# EAGLE board tACS_precision_revised (EAGLE 7.3.0)
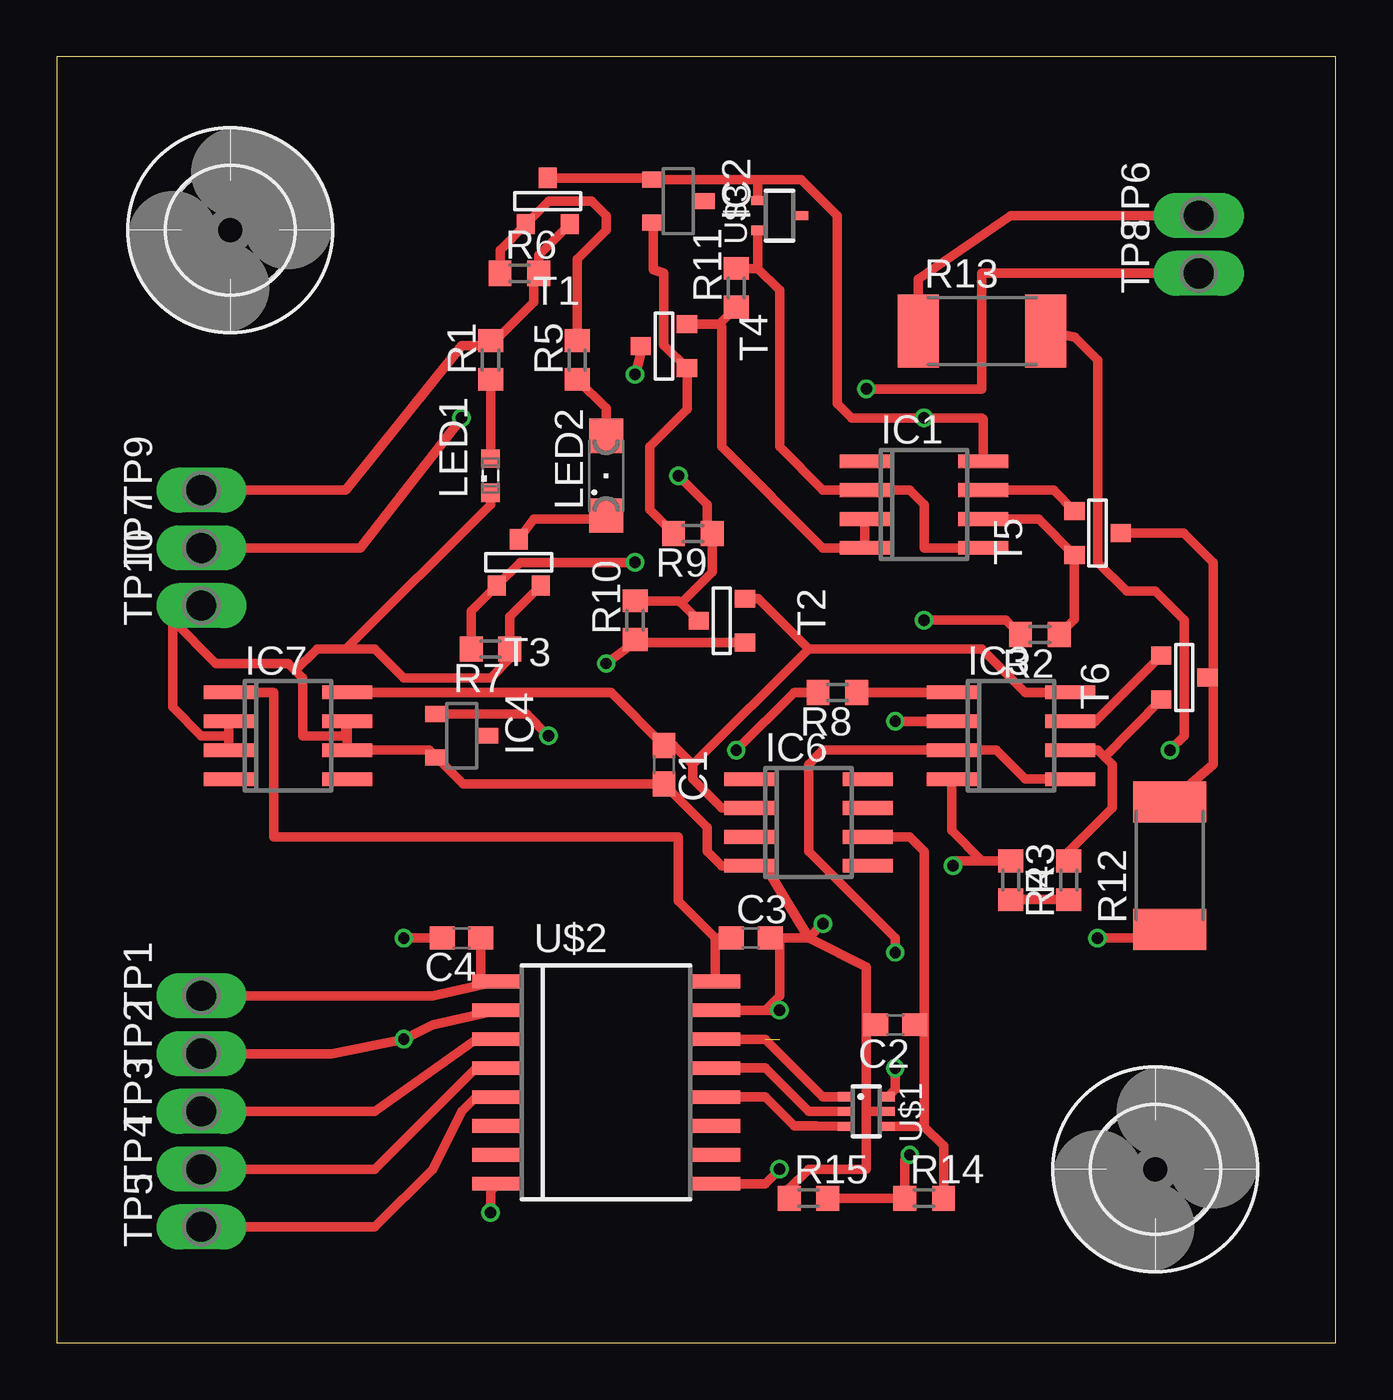
[diagram p0: board, top side]
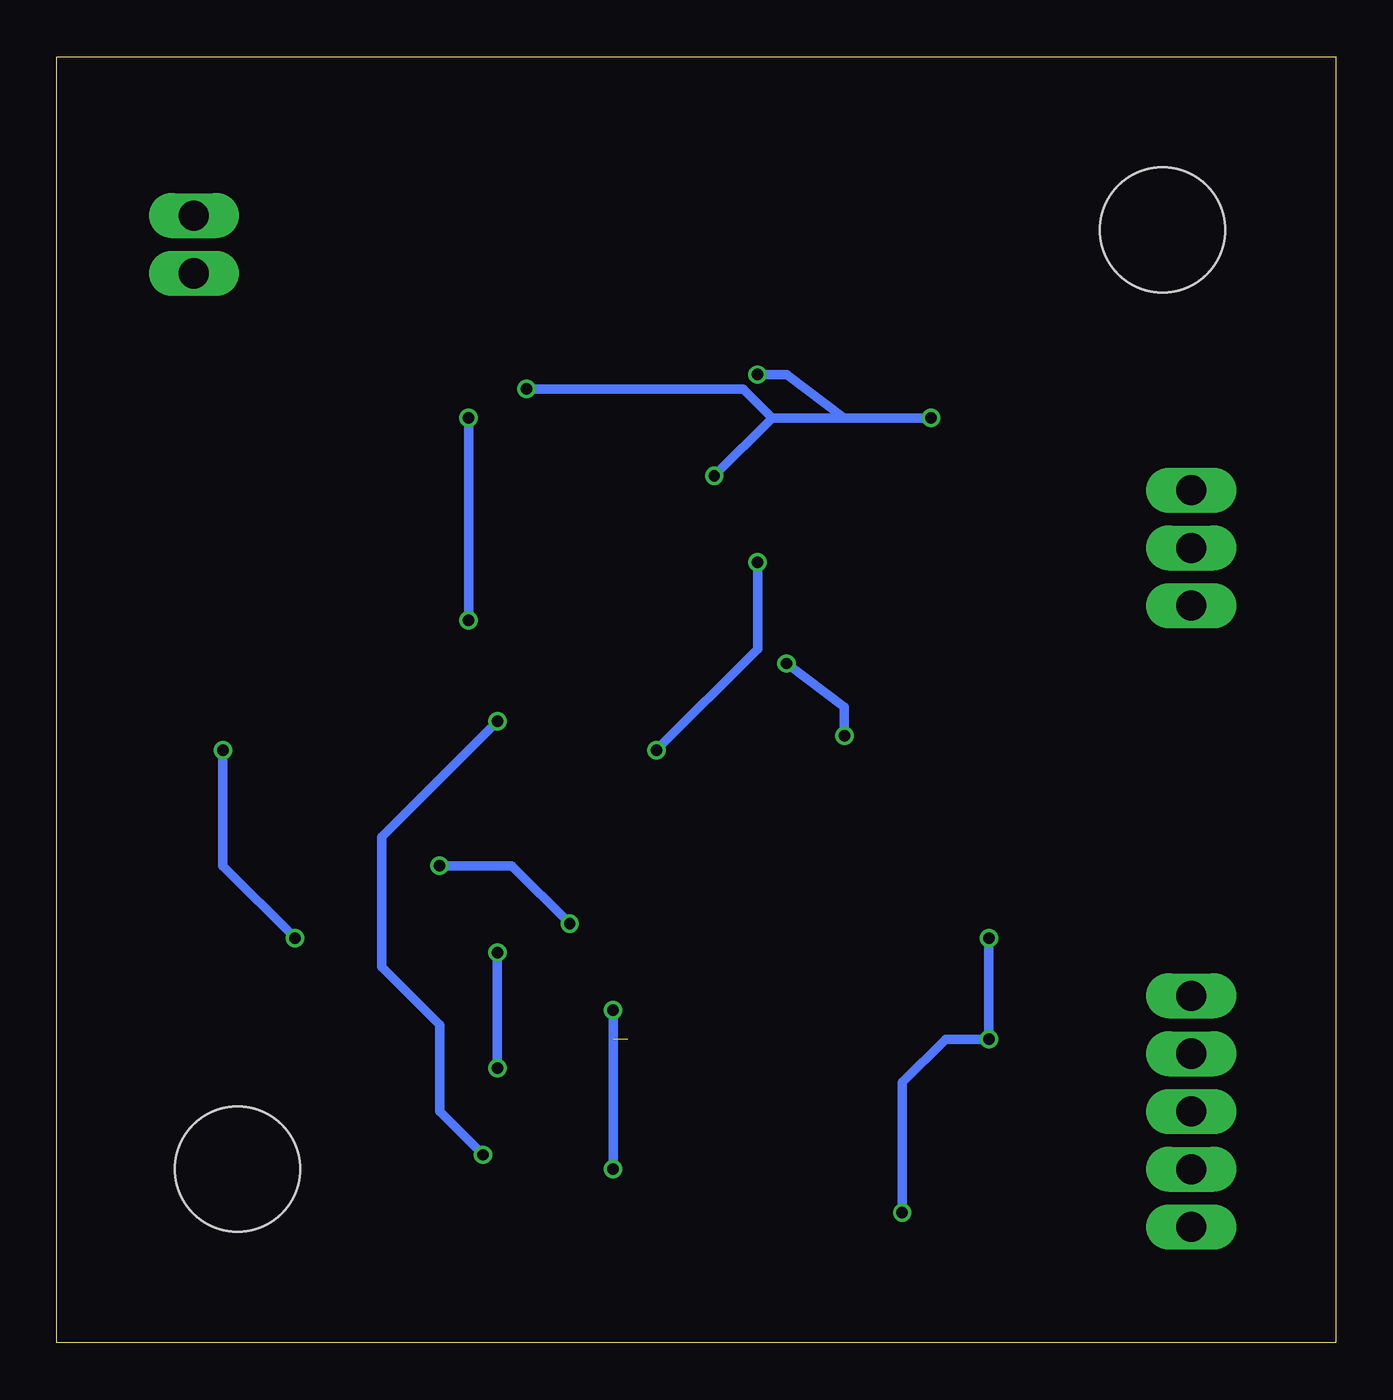
[diagram p1: board, bottom side, seen from below]

Size 56.19 x 56.51 mm. Coordinates in mm from the lower left corner, seen from the top.
Outline: 0,0 56.19,0 56.19,56.51 0,56.51 0,0
Copper layers (1*16): Top 0.035mm / dielectric 1.5mm / Bottom 0.035mm
Design rules "SeeedStudio_2layer_DRU_no_angle_20140221": minimum track width 6mil, minimum drill 12mil, track to track 6mil, track to pad 6mil, pad to pad 6mil, via to via 6mil, smd to smd 0mil, copper to edge 10mil, drill to drill 10mil, minimum pad ring 10mil, minimum via ring 6mil, stop-mask expansion 2mil, vias tented up to drill 100mil, thermal gap 10mil

## Footprints (pad centres in the part's own frame; a part is rotated, then mirrored left to right if it is on the bottom)
C1608 = smd 1.1 x 1: 1 -0.85,0; 2 0.85,0
5,5 = hole 5.5: 0,0
SO08 = smd 0.6 x 2.2: 1 -1.905,-2.6; 2 -0.635,-2.6; 3 0.635,-2.6; 4 1.905,-2.6; 5 1.905,2.6; 6 0.635,2.6; 7 -0.635,2.6; 8 -1.905,2.6
DBZ_R-PDSO-G3 = smd 0.7 x 1: 1 -0.95,-1.1; 2 0.95,-1.1; 3 0,1.1
SML0603 = smd 0.8 x 0.8: A 0.75,0; C -0.75,0
SML1206 = smd 1.5 x 1.5: A 1.75,0; C -1.75,0
R0603 = smd 1 x 1.1: 1 -0.85,0; 2 0.85,0
R2512 = smd 1.8 x 3.2: 1 -2.8,0; 2 2.8,0
SOT-23 = smd 0.787 x 0.889: 1 0.025,-1.016; 2 -0.94,1.016; 3 0.991,1.016
P1-13Y = drill 1.321 pad 1.905 long: TP 0,0
SC70-6 = smd 0.4 x 0.6: 1 -0.65,-0.95; 2 0,-0.95; 3 0.65,-0.95; 4 0.65,0.95; 5 0,0.95; 6 -0.65,0.95
SOIC16R = smd 0.6 x 2.2: 1 -4.445,-4.775; 2 -3.175,-4.775; 3 -1.905,-4.775; 4 -0.635,-4.775; 5 0.635,-4.775; 6 1.905,-4.775; 7 3.175,-4.775; 8 4.445,-4.775; 9 4.445,4.8; 10 3.175,4.8; 11 1.905,4.8; 12 0.635,4.8; 13 -0.635,4.8; 14 -1.905,4.8; 15 -3.175,4.8; 16 -4.445,4.8
SC70-3 = smd 0.4 x 0.6: 2 0,-0.95; ANODE -0.65,0.95; CATHODE 0.65,0.95

## Placement (x,y rotation side)
C1  1uF  [C1608]  26.67,25.4 270 top
C2  1uF  [C1608]  36.83,13.97 180 top
C3  1uF  [C1608]  30.48,17.78 0 top
C4  1uF  [C1608]  17.78,17.78 180 top
H1  MOUNT-HOLE5.5  [5,5]  48.26,7.62 0 top
H2  MOUNT-HOLE5.5  [5,5]  7.62,48.9 0 top
IC1  TLC2252  [SO08]  38.1,36.83 270 top
IC2  LM4040  [DBZ_R-PDSO-G3]  27.3,50.16 270 top
IC3  TLC2252  [SO08]  41.91,26.67 270 top
IC4  LM4040  [DBZ_R-PDSO-G3]  17.78,26.67 270 top
IC6  REF5050AIDR  [SO08]  33.02,22.86 270 top
IC7  L78L05  [SO08]  10.16,26.67 270 top
LED1  GREEN  [SML0603]  19.05,38.1 90 top
LED2  AMBER  [SML1206]  24.13,38.1 90 top
R1  75K  [R0603]  19.05,43.18 90 top
R2  1K  [R0603]  43.18,31.11 180 top
R3  1K  [R0603]  44.45,20.32 90 top
R4  86R6  [R0603]  41.91,20.32 270 top
R5  75K  [R0603]  22.86,43.18 90 top
R6  75K  [R0603]  20.32,46.99 0 top
R7  75K  [R0603]  19.05,30.48 180 top
R8  75K  [R0603]  34.29,28.57 180 top
R9  36K  [R0603]  27.94,35.56 180 top
R10  36K  [R0603]  25.4,31.75 90 top
R11  7K15  [R0603]  29.84,46.35 90 top
R12  2K2  [R2512]  48.9,20.95 90 top
R13  2K2  [R2512]  40.64,44.45 0 top
R14  75K  [R0603]  38.1,6.35 0 top
R15  7K15  [R0603]  33.02,6.35 0 top
T1  FMMT734  [SOT-23]  21.59,50.16 180 top
T2  FMMT634  [SOT-23]  29.21,31.75 270 top
T3  FMMT634  [SOT-23]  20.32,34.29 180 top
T4  FMMT734  [SOT-23]  26.67,43.81 270 top
T5  FMMT734  [SOT-23]  45.72,35.56 90 top
T6  FMMT634  [SOT-23]  49.53,29.21 90 top
TP1  TPPAD1-13Y  [P1-13Y]  6.35,15.24 90 top
TP2  TPPAD1-13Y  [P1-13Y]  6.35,12.7 90 top
TP3  TPPAD1-13Y  [P1-13Y]  6.35,10.16 90 top
TP4  TPPAD1-13Y  [P1-13Y]  6.35,7.62 90 top
TP5  TPPAD1-13Y  [P1-13Y]  6.35,5.08 90 top
TP6  TPPAD1-13Y  [P1-13Y]  50.16,49.53 90 top
TP7  TPPAD1-13Y  [P1-13Y]  6.35,34.92 90 top
TP8  TPPAD1-13Y  [P1-13Y]  50.16,46.99 90 top
TP9  TPPAD1-13Y  [P1-13Y]  6.35,37.47 90 top
TP10  TPPAD1-13Y  [P1-13Y]  6.35,32.38 90 top
U$1  DAC7311  [SC70-6]  35.56,10.16 270 top
U$2  SI8630BD  [SOIC16R]  24.13,11.43 270 top
U$3  ADR5041  [SC70-3]  31.75,49.53 90 top

## Library data of the parts
C1-C4 R1-R15 = rcl
H1 H2 = holes
IC1 IC3 IC6 IC7 = linear
IC2 IC4 = texas; MPN: LM4041A12IDBZR; OC_FARNELL: 1407949; OC_NEWARK: 58K5875
LED1 LED2 = led
T1 T4 T5 = zetex; MPN: FMMT720; OC_FARNELL: 9526471; OC_NEWARK: 96K9969
T2 T3 T6 = zetex; MPN: FMMT619; OC_FARNELL: 9526447; OC_NEWARK: 84K9343
TP1-TP10 = testpad
U$1-U$3 = precision_tACS

## Nets
N$1: LED1.A R1.1
N$2: LED2.C T3.1
N$3: C1.2 C2.2 C3.2 IC3.4 IC4.2 IC6.4 IC7.2 IC7.3 IC7.6 IC7.7 LED1.C R4.1 R7.1 R15.1 T3.2 TP10.TP U$1.5 U$2.9 U$2.15
N$4: R1.2 R6.2 T1.2 TP9.TP
N$5: R5.2 R6.1 T1.3
N$6: LED2.A R5.1
N$7: R7.2 R8.2 T3.3
N$8: IC1.8 IC2.1 R2.2 T1.1 U$3.CATHODE
N$9: IC4.1 R10.1 T2.3
N$10: IC2.2 R9.2 T4.3
N$11: R9.1 R10.2 T2.1 T4.1 TP7.TP TP8.TP
N$12: IC3.1 R8.1
N$13: IC1.6 R2.1 T5.2
N$14: IC1.7 T5.3
N$15: IC1.3 IC1.4 R11.1 T4.2
N$16: IC1.2 IC1.5 R11.2 U$3.ANODE
N$17: C1.1 IC3.8 IC6.2 IC7.8 T2.2
N$18: IC3.6 R3.2 T6.2
N$19: R3.1 R4.2
N$20: IC3.7 T6.3
N$21: IC3.3 IC3.5 U$1.6
N$22: R12.1 R13.2
N$23: R12.2 T5.1 T6.1
N$24: R13.1 TP6.TP
N$25: IC3.2 R14.1 R15.2
N$26: C2.1 IC6.6 R14.2 U$1.4
N$27: C4.1 TP1.TP U$2.1
N$29: C4.2 TP2.TP U$2.2 U$2.8
N$31: TP3.TP U$2.3
N$32: TP4.TP U$2.4
N$33: U$1.1 U$2.14
N$34: U$1.2 U$2.13
N$35: U$1.3 U$2.12
N$36: C3.1 IC7.1 U$2.16
N$37: TP5.TP U$2.5

## Tracks (layer width: path | path; a pad name or v marks a point on that pad's centre or on a via)
N$1
  Top 0.406: R1.1 LED1.A
N$2
  Top 0.406: LED2.C 23.98,36.2 20.95,36.2 T3.1
N$3  (via drill 0.5)
  Top 0.406: C3.2 31.75,17.78 | 31.75,17.78 31.75,15.24 31.11,14.61 | TP10.TP 5.08,32.38 5.08,31.75 | 7.56,26.67 IC7.2 7.62,27.25 | 7.56,26.67 IC7.3 | 5.08,31.75 6.99,29.84 10.16,29.84 10.48,29.53 | 10.48,29.53 10.79,29.21 10.79,26.67 12.7,26.67 12.7,27.25 IC7.7 IC7.6 16.36,26.04 IC4.2 17.85,24.55 C1.2 28.57,22.64 28.57,21.59 29.21,20.95 IC6.4 31.11,20.95 33.02,17.78 | 5.08,31.75 5.08,27.94 6.35,26.67 7.56,26.67 | U$2.15 31.11,14.61 | 31.11,14.61 v31.75,14.61 | v31.75,7.62 31.11,6.99 U$2.9 | C2.2 35.56,13.55 | 35.56,13.55 35.56,10.16 | 35.56,10.16 U$1.5 | 35.56,13.55 35.56,16.51 33.02,17.78 | R4.1 40.64,21.17 | 40.64,21.17 39.37,21.17 v39.37,20.95 | v33.66,18.41 33.02,17.78 | 31.75,17.78 33.02,17.78 | IC3.4 39.31,22.5 40.64,21.17 | R15.1 32.17,6.77 33.02,7.62 35.56,7.62 35.56,10.16 | 19.99,30.57 R7.1 | R7.1 19.9,30.06 19.05,29.21 15.24,29.21 13.97,30.48 12.7,30.48 | 12.7,30.48 11.43,30.48 10.48,29.53 | LED1.C 19.05,36.83 12.7,30.48 | T3.2 19.9,31.91 R7.1
  Bottom 0.406: v31.75,14.61 v31.75,7.62 | v39.37,20.95 36.2,20.95 v33.66,18.41
N$4
  Top 0.406: TP9.TP 12.7,37.47 17.78,43.81 18.84,43.81 R1.2 19.27,44.03 20.95,45.72 20.95,46.77 R6.2 21.17,47.79 T1.2
N$5
  Top 0.406: R6.1 19.47,48.02 T1.3 21.61,50.16 23.5,50.16 24.13,49.53 24.13,48.9 22.86,47.62 R5.2
N$6
  Top 0.406: LED2.A 24.13,41.06 R5.1
N$7  (via drill 0.5)
  Top 0.406: 18.06,30.62 R7.2 18.2,32.15 T3.3 20.34,34.29 v25.4,34.29 | R8.2 32.38,28.57 v29.84,26.04
  Bottom 0.406: v29.84,26.04 25.4,30.48 v25.4,34.29
N$8  (via drill 0.5)
  Top 0.406: T1.1 26.27,51.18 IC2.1 30.48,51.12 30.8,51.12 | R2.2 41.7,31.75 v38.1,31.75 | IC1.8 40.7,40.58 40.64,40.64 v38.1,40.64 34.92,40.64 34.29,41.27 34.29,49.53 32.7,51.12 30.8,51.12 | U$3.CATHODE 30.8,51.12
  Bottom 0.406: v38.1,31.75 v38.1,40.64
N$9  (via drill 0.5)
  Top 0.406: IC4.1 20.64,27.62 v21.59,26.67 | v24.13,29.84 24.98,30.48 R10.1 25.54,30.76 T2.3
  Bottom 0.406: v21.59,26.67 21.59,27.94 v24.13,29.84
N$10
  Top 0.406: IC2.2 26.2,47.16 26.67,46.99 26.67,43.84 T4.3 27.69,41.02 26.04,39.37 26.04,36.62 R9.2
N$11  (via drill 0.5)
  Top 0.406: TP7.TP 13.34,34.92 v17.78,40.64 | R10.2 27.32,32.6 27.42,32.5 | 27.42,32.5 T2.1 | 27.42,32.5 28.79,33.87 R9.1 28.57,35.77 28.57,36.83 v27.3,38.1 | T4.1 25.65,43.43 v25.4,42.55 | TP8.TP 40.64,46.99 40.64,41.91 v35.56,41.91
  Bottom 0.406: v17.78,40.64 21.59,40.64 | v25.4,42.55 24.13,42.55 21.59,40.64 | 21.59,40.64 24.77,40.64 | 24.77,40.64 v27.3,38.1 | v35.56,41.91 26.04,41.91 24.77,40.64
N$12
  Top 0.406: IC3.1 R8.1
N$13
  Top 0.406: IC1.6 43.13,36.2 T5.2 44.7,31.79 R2.1
N$14
  Top 0.406: IC1.7 43.79,37.47 T5.3
N$15
  Top 0.406: T4.2 29.09,44.76 | 29.09,44.76 R11.1 | 29.09,44.76 29.21,44.64 29.21,39.37 33.66,34.92 IC1.4 IC1.3
N$16
  Top 0.406: IC1.5 38.1,34.92 38.1,36.83 37.47,37.47 IC1.2 33.66,37.47 31.75,39.37 31.75,46.26 30.8,47.2 | U$3.ANODE 30.8,47.2 | 30.8,47.2 R11.2
N$17
  Top 0.406: 27.94,25.4 27.09,26.25 C1.1 24.34,28.57 IC7.8 | 27.94,25.4 27.94,24.77 29.21,23.5 IC6.2 | IC3.8 42.55,28.57 40.64,30.48 33.02,30.48 | 33.02,30.48 27.94,25.4 | T2.2 30.81,32.69 33.02,30.48
N$18
  Top 0.406: R3.2 44.45,21.59 46.35,23.5 46.35,25.4 46.02,25.73 | IC3.6 45.72,26.04 46.02,25.73 | T6.2 46.02,25.73
N$19
  Top 0.406: R3.1 R4.2
N$20
  Top 0.406: IC3.7 45.62,27.3 T6.3
N$21  (via drill 0.5)
  Top 0.406: U$1.6 36.83,11.13 v36.83,12.06 | IC3.5 42.55,24.77 41.27,26.04 IC3.3 33.66,26.04 33.02,25.4 33.02,21.59 36.83,17.78 v36.83,17.14
  Bottom 0.406: v36.83,12.06 v36.83,17.14
N$22  (via drill 0.5)
  Top 0.406: R13.2 44.71,44.19 45.72,43.18 45.72,34.29 46.99,33.02 48.26,33.02 49.53,31.75 49.53,26.67 v48.9,26.04 | v45.72,17.78 48.52,17.78 R12.1
  Bottom 0.406: v48.9,26.04 48.9,20.95 v45.72,17.78
N$23
  Top 0.406: R12.2 50.8,25.4 50.8,28.98 T6.1 50.8,29.49 50.8,34.29 49.51,35.59 T5.1
N$24
  Top 0.406: R13.1 37.84,46.73 41.91,49.53 TP6.TP
N$25  (via drill 0.5)
  Top 0.406: R15.2 R14.1 37.25,8.04 v37.47,8.26 | v36.83,27.3 IC3.2
  Bottom 0.406: v37.47,8.26 39.37,10.16 39.37,13.97 41.91,16.51 41.91,22.23 v36.83,27.3
N$26
  Top 0.406: C2.1 38.1,13.55 | 38.1,13.55 38.1,9.53 38.09,9.51 | 38.09,9.51 U$1.4 | IC6.6 37.47,22.23 38.1,21.59 38.1,13.55 | R14.2 38.95,8.64 38.09,9.51
N$27
  Top 0.406: TP1.TP 16.51,15.24 U$2.1 18.63,15.88 C4.1
N$29  (via drill 0.5)
  Top 0.406: TP2.TP 12.06,12.7 v15.24,13.34 16.51,13.97 U$2.2 | v19.05,5.71 19.05,6.68 U$2.8 | C4.2 v15.24,17.78
  Bottom 0.406: v15.24,17.78 v15.24,13.34 17.14,13.34 19.05,11.43 v19.05,5.71
N$31
  Top 0.406: TP3.TP 13.97,10.16 18.41,13.34 U$2.3
N$32
  Top 0.406: TP4.TP 13.97,7.62 18.41,12.06 U$2.4
N$33  (1 unrouted)
  Top 0.406: U$2.14 31.11,13.34 33.66,10.79 33.99,10.79 U$1.1
N$34
  Top 0.406: U$2.13 31.11,12.06 33.02,10.16 U$1.2
N$35
  Top 0.406: U$2.12 31.11,10.79 32.38,9.53 33.35,9.53 U$1.3
N$36
  Top 0.406: C3.1 28.93,17.78 | 28.93,17.78 U$2.16 | IC7.1 9.53,28.57 9.53,22.23 27.3,22.23 27.3,19.41 28.93,17.78
N$37
  Top 0.406: TP5.TP 13.97,5.08 16.51,7.62 17.78,10.16 18.41,10.79 U$2.5

## Text on the board
tValues: HUMAN_+I_OUT | HUMAN_GND | ISO/+36V | ISO/GND | ISO/-36V | ELECTRICAL ISOLATION | SPI_VCC | SPI_GND | SPI_*CS | SPI_SCK | SPI_MOSI